# EAGLE board check_battery-board (EAGLE 9.6.2)
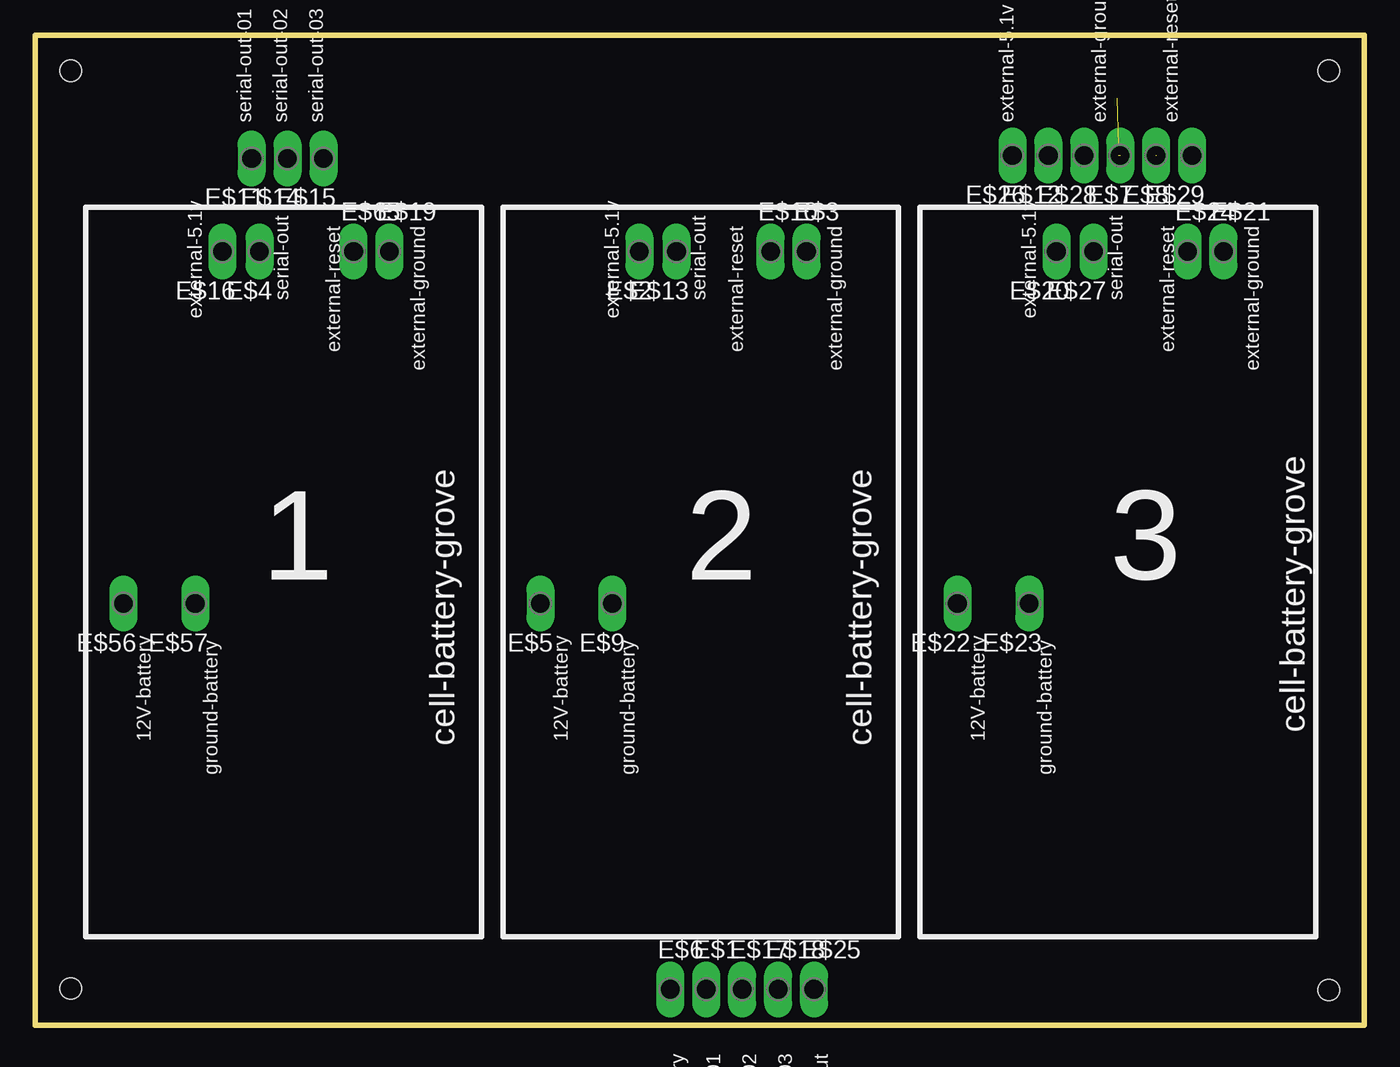
[diagram p0: board, top side]
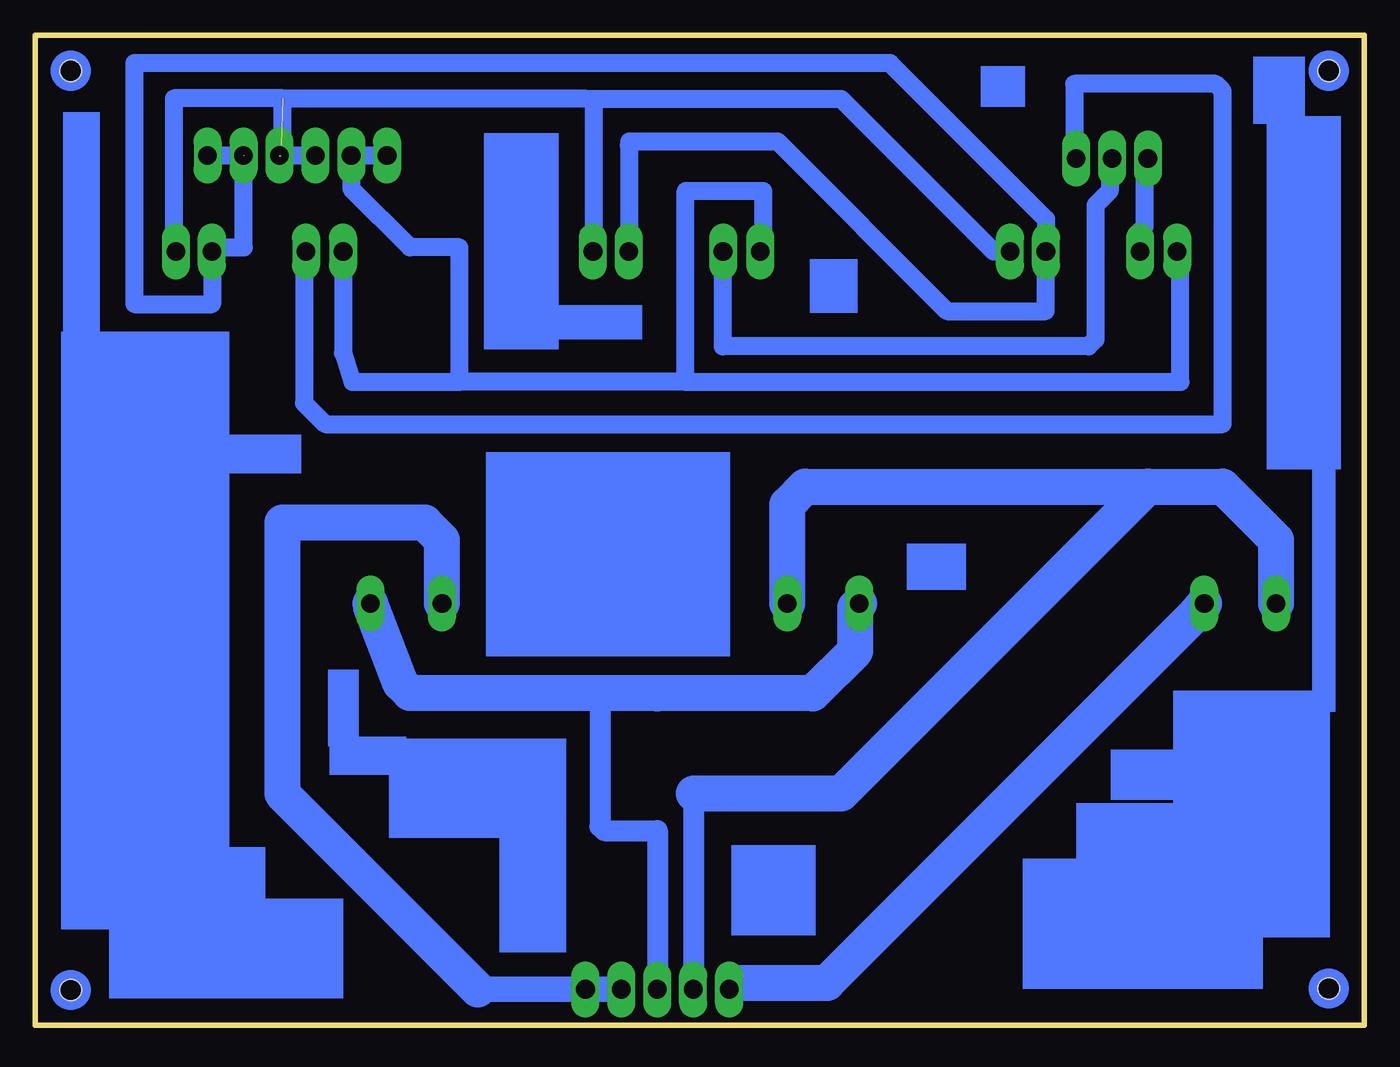
[diagram p1: board, bottom side, seen from below]

Size 94 x 70 mm. Coordinates in mm from the lower left corner, seen from the top.
Outline: 0,70 94,70 94,0 0,0 0,70
Copper layers (1*16): Top 0.035mm / dielectric 1.5mm / Bottom 0.035mm
Design rules "for_pcb_garage *": minimum track width 1mm, minimum drill 0.35mm, track to track 1mm, track to pad 0.5mm, pad to pad 0.5mm, via to via 6mil, smd to smd 6mil, copper to edge 1mm, drill to drill 1mm, minimum pad ring 10mil, minimum via ring 8mil, stop-mask expansion 4mil, vias tented up to drill 0mil, thermal gap 10mil
Holes 1.5 mm at 91.5,2.5 91.5,67.5 2.5,67.5 2.5,2.6

## Footprints (pad centres in the part's own frame; a part is rotated, then mirrored left to right if it is on the bottom)
P1-13Y = drill 1.321 pad 1.905 long: TP 0,0

## Placement (x,y rotation side)
E$1  in-ground  [P1-13Y]  47.46,2.54 0 top
E$2  [P1-13Y]  42.73,54.72 180 top
E$3  in-ground  [P1-13Y]  54.55,54.72 0 top
E$4  SERIAL OUT  [P1-13Y]  15.85,54.72 180 top
E$5  [P1-13Y]  35.73,29.82 180 top
E$6  [P1-13Y]  44.92,2.54 0 top
E$7  in-ground  [P1-13Y]  76.74,61.5 180 top
E$8  [P1-13Y]  79.28,61.5 180 top
E$9  [P1-13Y]  40.81,29.82 180 top
E$10  [P1-13Y]  52.01,54.72 0 top
E$11  in-ground  [P1-13Y]  15.3,61.3 180 top
E$12  [P1-13Y]  71.66,61.5 180 top
E$13  SERIAL OUT  [P1-13Y]  45.35,54.72 180 top
E$14  in-ground  [P1-13Y]  17.84,61.3 180 top
E$15  in-ground  [P1-13Y]  20.38,61.3 180 top
E$16  [P1-13Y]  13.23,54.72 180 top
E$17  in-ground  [P1-13Y]  50,2.54 0 top
E$18  in-ground  [P1-13Y]  52.54,2.54 0 top
E$19  in-ground  [P1-13Y]  25.05,54.72 0 top
E$20  [P1-13Y]  72.23,54.72 180 top
E$21  in-ground  [P1-13Y]  84.05,54.72 0 top
E$22  [P1-13Y]  65.23,29.82 180 top
E$23  [P1-13Y]  70.31,29.82 180 top
E$24  [P1-13Y]  81.51,54.72 0 top
E$25  in-ground  [P1-13Y]  55.08,2.54 0 top
E$26  [P1-13Y]  69.12,61.5 180 top
E$27  SERIAL OUT  [P1-13Y]  74.85,54.72 180 top
E$28  in-ground  [P1-13Y]  74.2,61.5 180 top
E$29  [P1-13Y]  81.82,61.5 180 top
E$56  [P1-13Y]  6.23,29.82 180 top
E$57  [P1-13Y]  11.31,29.82 180 top
E$65  [P1-13Y]  22.51,54.72 0 top

## Library data of the parts
E$1-E$29 E$56 E$57 E$65 = testpad

## Nets
S$2: E$6.TP E$57.TP
S$4: E$1.TP E$9.TP E$56.TP
S$5: E$5.TP E$17.TP E$23.TP
S$7: E$18.TP E$22.TP E$25.TP
S$8: E$2.TP E$12.TP E$16.TP E$20.TP E$26.TP
S$9: E$4.TP E$11.TP
S$10: E$13.TP E$14.TP
S$11: E$15.TP E$27.TP
S$12: E$8.TP E$10.TP E$24.TP E$29.TP E$65.TP
S$13: E$3.TP E$7.TP E$19.TP E$21.TP E$28.TP

## Tracks (layer width: path | path; a pad name or v marks a point on that pad's centre or on a via)
S$2
  Bottom 1: 44,3 E$6.TP
  Bottom 2.54: 44,3 38,3 12,29 E$57.TP
S$4
  Bottom 1: 47.44,2.56 E$1.TP
  Bottom 1.5: 47.44,16.38 47.44,2.56
  Bottom 2.54: E$56.TP 6.23,34.31 10,38.08 15.3,38.08 | 15.3,38.08 39.54,38.08 40.81,36.81 E$9.TP | 47.44,16.38 37,16.38 15.3,38.08
S$5
  Bottom 1.5: 50,23.46 53.8,23.44 54.06,23.18 54.06,14.07 53.75,13.76 50,13.76 E$17.TP
  Bottom 2.54: E$5.TP 36,29.55 36,26.46 39,23.46 50,23.46 50.04,23.5 67.5,23.5 68.17,24.17 E$23.TP
S$7
  Bottom 1: E$18.TP E$25.TP
  Bottom 1.8: 62.7,2.54 E$18.TP
  Bottom 2.54: 62.7,2.54 76.54,16.38 76.54,35.54 66.46,35.54 65.23,34.31 E$22.TP
S$8
  Bottom 1: 13,54 E$16.TP
  Bottom 1.27: 13,54 13,45.5 48,45.5 | 64,45.5 71.58,45.5 72.23,47.54 E$20.TP | E$2.TP 42.51,54.94 42.51,59 48,59 48,45.5 | 64,45.5 64,55 67.5,55 71.66,59.16 E$12.TP E$26.TP | 48,45.5 64,45.5
S$9
  Bottom 1: 16,55 16,56
  Bottom 1.27: E$11.TP 15.55,61.05 15.55,56.45 16,56 | 16,55 E$4.TP
S$10
  Bottom 1: 18,61 E$14.TP
  Bottom 1.27: E$13.TP 45.38,54.69 45.38,48 19.5,48 19,48.5 19,58 18,59 18,61
S$11
  Bottom 1: E$15.TP 20.5,61.42 | 75,54 E$27.TP
  Bottom 1.27: 20.5,61.42 20.5,66.57 10.5,66.57 10,66.07 10,42.5 73.5,42.5 75,44 75,54
S$12  (1 unrouted)
  Bottom 1: 81,55 E$24.TP | 22.52,54.7 E$65.TP 22.5,54.73 | 52.01,62.22 52,62.5
  Bottom 1.27: 79.25,61.52 79.25,55 81,55 | 22.52,54.7 22.52,50.5 29.5,50.5 41.5,62.5 52,62.5 | 52.01,62.22 E$10.TP | E$24.TP 81.5,51 87,51 87,68.04 33.54,68.04 22.5,57 22.5,54.73 | E$8.TP E$29.TP
S$13  (2 unrouted)
  Bottom 1: 54.5,65 55,65.5 | E$3.TP 54.5,54.77 | E$3.TP 55,55 55,56 E$3.TP | 76.61,62.24 76.61,61.5 | E$7.TP 76.5,61.74
  Bottom 1.27: 54.5,65 54.5,54.77 | E$19.TP 26.22,54.72 37,65.5 55,65.5 76.5,65.5 76.5,61.74 | E$21.TP 84.2,54.87 84.2,65.54 76.5,65.54 | E$28.TP E$7.TP
(copper drawn outside any net)
  shapes: Bottom area x25, Bottom circle x4

## Text on the board
tPlace: serial-out-01 | serial-out-02 | serial-out-03 | external-5.1v | external-ground | external-reset | external-reset | external-ground | external-reset | external-ground | external-reset | external-ground | serial-out | serial-out | serial-out | external-5.1v | external-5.1v | external-5.1v | cell-battery-grove | cell-battery-grove | cell-battery-grove | 1 | 2 | 3 | 12V-battery | 12V-battery | 12V-battery | ground-battery | ground-battery | ground-battery | ground-battery | 12V-battery 01 | 12V-battery 02 | 12V-battery 03 | ground-battery-first-out